# EAGLE board Bulk Board 5 (EAGLE 8.3.1)
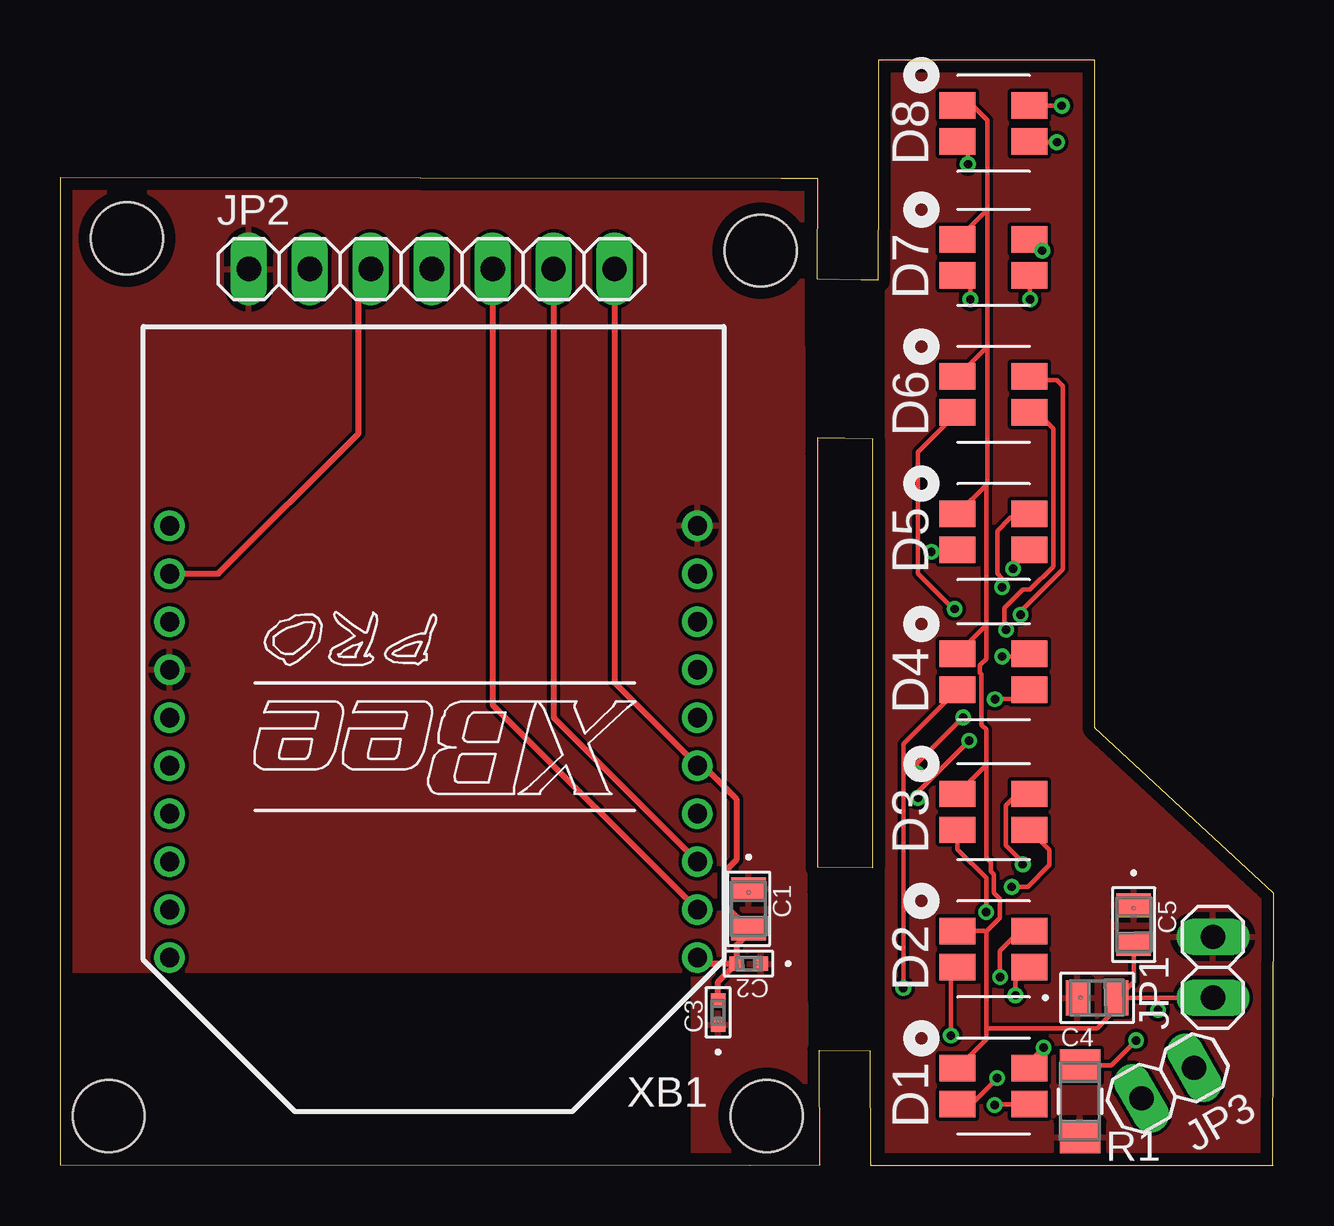
[diagram p0: board, top side]
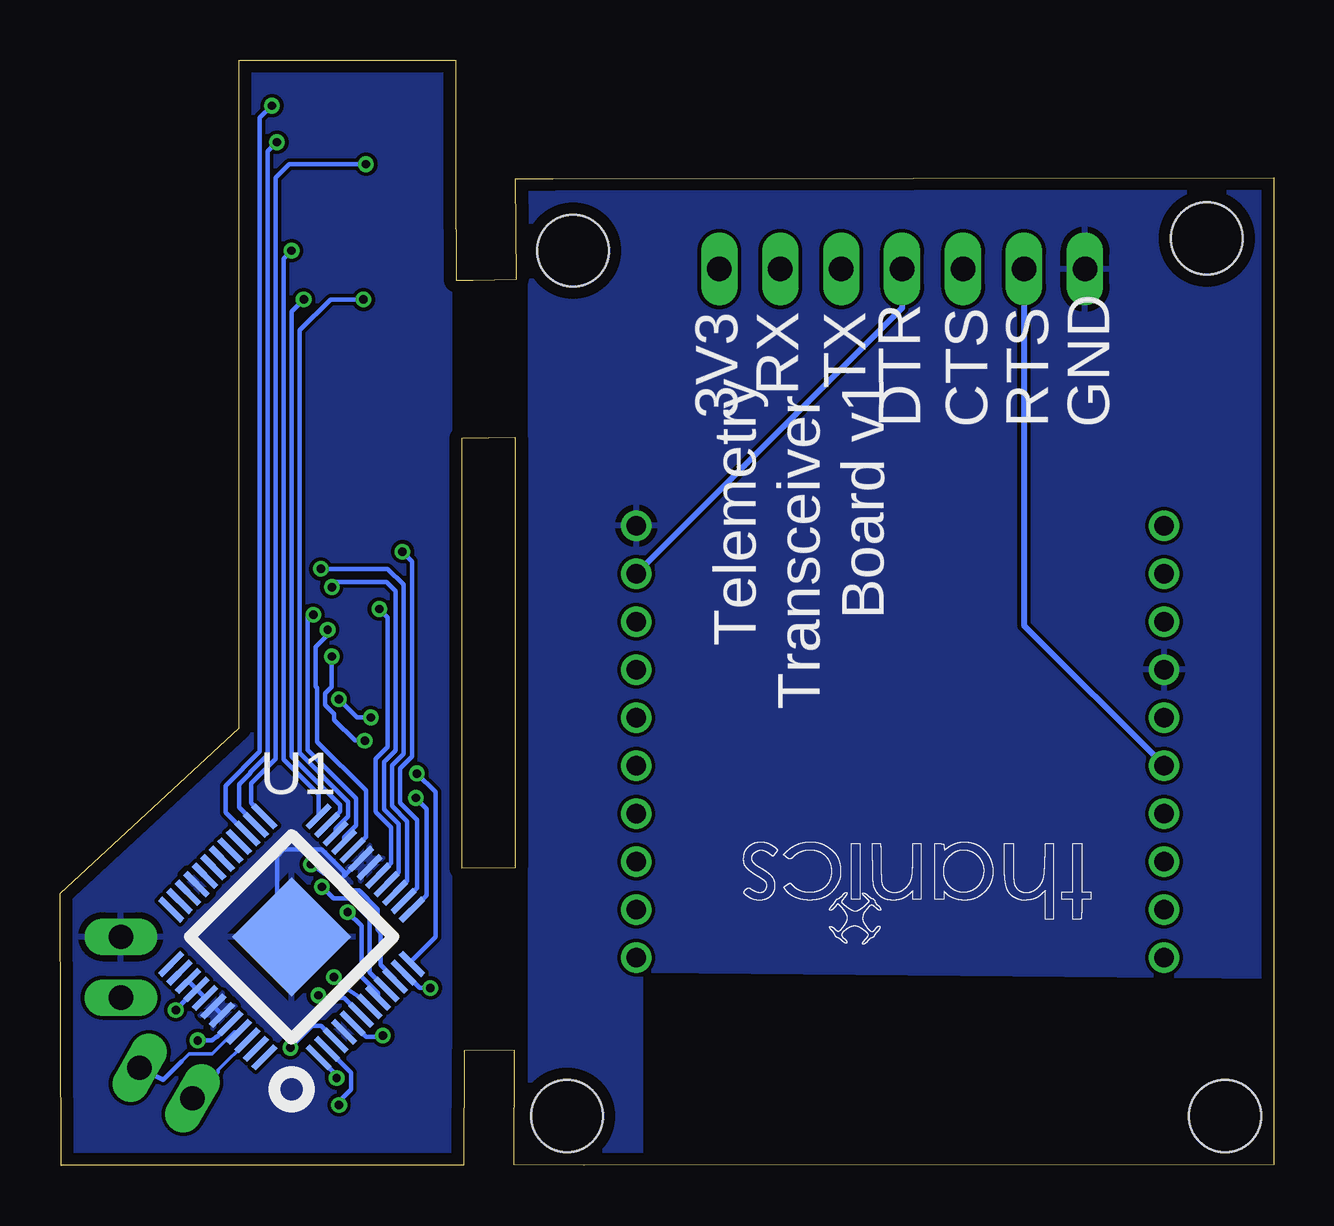
[diagram p1: board, bottom side, seen from below]

Size 50.6 x 46.1 mm. Coordinates in mm from the lower left corner, seen from the top.
Outline: 0,0.05 28.75,0.03 31.67,0.05 31.65,4.83 33.76,4.8 33.78,0.03 50.55,0.03 50.55,0 50.6,11.35 43.13,18.26 43.13,46.1 34.11,46.1 34.11,41.15 34.09,36.93 33.38,36.93 31.57,36.96 31.6,41.15 30.05,41.15 0,41.2 0,0.05
Outline: 31.6,12.45 31.6,30.35 33.86,30.33 33.86,12.42 31.6,12.45
Copper layers (1*16): Top 0.035mm / dielectric 1.6mm / Bottom 0.035mm
Design rules "Elecrow_2-layer_PCB_eagle_rule": minimum track width 6mil, minimum drill 12mil, track to track 6mil, track to pad 6mil, pad to pad 6mil, via to via 8mil, smd to smd 0mil, copper to edge 20mil, drill to drill 10mil, minimum pad ring 6mil, minimum via ring 6mil, stop-mask expansion 0mil, vias tented up to drill 100mil, thermal gap 10mil
Holes 3 mm at 2.79,38.66 29.21,38.15 29.46,2.08 2.03,2.08
tRestrict: area 0,0.1 to 26.2,7.9
bRestrict: area 0,0.1 to 26.2,7.9

## Footprints (pad centres in the part's own frame; a part is rotated, then mirrored left to right if it is on the bottom)
YAG_CC0805 = smd 0.965 x 1.448: 1 -0.826,0; 2 0.826,0
G-155-M = smd 0.559 x 0.61: 1 -0.521,0; 2 0.521,0
0805 = smd 0.965 x 1.448: 1 -0.826,0; 2 0.826,0
ASMB-MTB0_LED = smd 1.1 x 1.5: 1 -0.75,-1.5; 2 -0.75,1.5; 3 0.75,1.5; 4 0.75,-1.5
1X02 = drill 1.016 long: 1 -1.27,0; 2 1.27,0
1X07 = drill 1.016 long: 1 -7.62,0; 2 -5.08,0; 3 -2.54,0; 4 0,0; 5 2.54,0; 6 5.08,0; 7 7.62,0
RC1206N-M = smd 1.321 x 1.702: 1 -1.499,0; 2 1.499,0
TQFP-48 = smd 1.3 x 0.25: 1 -4.35,2.75; 2 -4.35,2.25; 3 -4.35,1.75; 4 -4.35,1.25; 5 -4.35,0.75; 6 -4.35,0.25; 7 -4.35,-0.25; 8 -4.35,-0.75; 9 -4.35,-1.25; 10 -4.35,-1.75; 11 -4.35,-2.25; 12 -4.35,-2.75; 25 4.35,-2.75; 26 4.35,-2.25; 27 4.35,-1.75; 28 4.35,-1.25; 29 4.35,-0.75; 30 4.35,-0.25; 31 4.35,0.25; 32 4.35,0.75; 33 4.35,1.25; 34 4.35,1.75; 35 4.35,2.25; 36 4.35,2.75 | smd 0.25 x 1.3: 13 -2.75,-4.35; 14 -2.25,-4.35; 15 -1.75,-4.35; 16 -1.25,-4.35; 17 -0.75,-4.35; 18 -0.25,-4.35; 19 0.25,-4.35; 20 0.75,-4.35; 21 1.25,-4.35; 22 1.75,-4.35; 23 2.25,-4.35; 24 2.75,-4.35; 37 2.75,4.35; 38 2.25,4.35; 39 1.75,4.35; 40 1.25,4.35; 41 0.75,4.35; 42 0.25,4.35; 43 -0.25,4.35; 44 -0.75,4.35; 45 -1.25,4.35; 46 -1.75,4.35; 47 -2.25,4.35; 48 -2.75,4.35 | smd 3.5 x 3.5: EP 0,0
XBEE-PRO = drill 0.8 pad 1.27: 1 -11,9; 2 -11,7; 3 -11,5; 4 -11,3; 5 -11,1; 6 -11,-1; 7 -11,-3; 8 -11,-5; 9 -11,-7; 10 -11,-9; 11 11,-9; 12 11,-7; 13 11,-5; 14 11,-3; 15 11,-1; 16 11,1; 17 11,3; 18 11,5; 19 11,7; 20 11,9

## Placement (x,y rotation side)
C1  1uF  [YAG_CC0805]  28.7,10.72 270 top
C2  16pF  [G-155-M]  28.7,8.43 180 top
C3  16pF  [G-155-M]  27.43,6.4 90 top
C4  0.1uF  [0805]  43.23,7.01 0 top
C5  1uF  [YAG_CC0805]  44.75,10.06 270 top
D1  [ASMB-MTB0_LED]  38.91,3.33 270 top
D2  [ASMB-MTB0_LED]  38.91,9.04 270 top
D3  [ASMB-MTB0_LED]  38.91,14.76 270 top
D4  [ASMB-MTB0_LED]  38.91,20.6 270 top
D5  [ASMB-MTB0_LED]  38.91,26.44 270 top
D6  [ASMB-MTB0_LED]  38.91,32.16 270 top
D7  [ASMB-MTB0_LED]  38.91,37.87 270 top
D8  [ASMB-MTB0_LED]  38.91,43.46 270 top
JP1  [1X02]  48.06,8.28 90 top
JP2  [1X07]  15.49,37.39 0 top
JP3  [1X02]  46.18,3.45 210 top
R1  3k3  [RC1206N-M]  42.52,2.69 90 top
U1  [TQFP-48]  40.94,9.55 135 bottom
XB1  XBEE-PRO  [XBEE-PRO]  15.57,17.69 180 top

## Library data of the parts
C1 = Telemetry Transceiver Board; COPYRIGHT: Copyright C 2015 Accelerated Designs. All rights reserved; MANUFACTURER_PART_NUMBER: CC0805KKX7R7BB105; VENDOR: Vendor
C2 C3 = Telemetry Transceiver Board; MANUFACTURER_PART_NUMBER: GRM1555C1H160JA01D; VENDOR: Murata
C4 = 0.1uF X7R Ceramic Capacitor; COPYRIGHT: Copyright C 2015 Accelerated Designs. All rights reserved; MANUFACTURER_PART_NUMBER: 08055C104KAT2A; VENDOR: Vendor
C5 = 1uF X7R Ceramic Capacitor; COPYRIGHT: Copyright C 2015 Accelerated Designs. All rights reserved; MANUFACTURER_PART_NUMBER: CC0805KKX7R7BB105; VENDOR: Vendor
D1-D8 U1 = thanics_robotics
JP1 JP3 = pinhead
JP2 = Telemetry Transceiver Board
R1 = 3.3k-resistor; MANUFACTURER_PART_NUMBER: RC1206JR073K3L; VENDOR: Yageo
XB1 = xbee; MPN: XBP24-AWI-001; OC_FARNELL: 1337916; OC_NEWARK: 42M2667

## Nets
!CTS: JP2.3 XB1.12
!DTR: JP2.4 XB1.9
!RTS: JP2.2 XB1.16
+3V3: C1.2 C2.2 C3.2 JP2.7 XB1.1 XB1.5
+5V: C4.2 C5.2 D1.1 D2.1 D3.1 D4.1 D5.1 D6.1 D7.1 D8.1 JP1.1 U1.39 U1.40 U1.41
GND: C1.1 C2.1 C3.1 JP2.1 XB1.10 XB1.14
GND1: C4.1 C5.1 JP1.2 R1.1 U1.4 U1.18 U1.19 U1.33 U1.42 U1.43 U1.EP
N$1: D1.4 U1.1
N$2: D1.3 U1.2
N$3: D2.3 U1.6
N$4: D1.2 U1.3
N$5: D2.4 U1.5
N$6: R1.2 U1.44
N$7: D3.4 U1.8
N$8: D3.3 U1.9
N$9: D3.2 U1.10
N$10: D4.4 U1.11
N$11: D4.3 U1.12
N$12: D4.2 U1.13
N$13: D5.4 U1.14
N$14: D5.3 U1.15
N$15: D5.2 U1.16
N$16: D6.4 U1.17
N$17: D6.3 U1.20
N$18: D6.2 U1.21
N$19: D7.4 U1.22
N$20: D7.3 U1.23
N$21: D7.2 U1.24
N$22: D8.4 U1.25
N$23: D8.3 U1.26
N$24: D8.2 U1.27
N$25: D2.2 U1.7
RX: JP2.6 XB1.3
SCL: JP3.2 U1.46
SDA: JP3.1 U1.45
TX: JP2.5 XB1.2

## Tracks (layer width: path | path; a pad name or v marks a point on that pad's centre or on a via)
!CTS
  Top 0.254: XB1.12 6.6,24.69 12.45,30.53 12.45,36.88 JP2.3
!DTR
  Bottom 0.254: JP2.4 15.49,35.76 XB1.9
!RTS
  Bottom 0.254: JP2.2 10.41,22.53 XB1.16
+3V3
  Top 0.254: JP2.7 23.11,20.14 XB1.5 26.8,16.69 28.19,15.29 28.19,12.75 27.69,12.24 27.69,10.91 C1.2 28.7,9.7 28.19,9.19 28.19,8.45 C2.2 | C3.2 27.43,7.68 C2.2 | C2.2 26.83,8.43 XB1.1
+5V  (via drill 0.35)
  Top 0.178: D8.1 38.04,44.21 38.66,43.59 38.66,39.87 | 38.66,39.87 D7.1 | 38.66,39.87 38.66,34.15 | 38.66,34.15 D6.1 | 38.66,34.15 38.66,28.44 38.61,28.39 | 38.61,28.39 D5.1 | 38.61,28.39 38.61,22.55 | 38.61,22.55 D4.1 | D3.1 38.61,16.71 38.61,16.59 | 38.61,9.71 38.61,9.78 39.18,10.35 39.18,11.13 38.94,11.38 38.94,12.14 38.81,12.27 38.81,12.65 38.61,12.85 38.61,16.59 | 38.61,9.71 38.61,5.74 | 38.61,5.74 38.61,5.28 D1.1 | 38.61,5.74 43.23,5.74 43.74,6.25 43.74,6.69 C4.2 | JP1.1 45.83,7.01 | C5.2 44.76,7.67 44.1,7.01 C4.2 | v45.77,6.5 45.77,6.95 45.83,7.01 | 38.61,22.55 38.61,21.14 38.35,20.88 38.35,20.55 38.4,20.5 38.4,18.39 38.61,18.19 38.61,16.59 | D2.1 38.53,9.79 38.61,9.71 | 45.83,7.01 C4.2
  Bottom 0.178: U1.39 U1.40 | U1.40 44.91,7.36 v45.77,6.5 | U1.40 U1.41
GND
  pour Top: 0,41.2 30.89,41.02 31.06,0 0,0.05
  pour Bottom: 0,41.2 30.99,41.12 30.99,-0.03 0,0.05
GND1
  Bottom 0.178: U1.42 U1.43 | U1.19 38.76,12.09 38.76,12.26 39.69,13.19 41.27,13.19 41.55,12.9 41.55,11.07 41.4,10.92 41.4,10.01 U1.EP
  pour Bottom: 34.34,46.13 50.6,46.13 50.6,-0.1 34.34,-0.1
  pour Top: 34.47,46.1 50.6,46.13 50.6,-0.1 34.47,-0.13
N$1  (via drill 0.35)
  Top 0.178: D1.4 37.98,2.58 v39.06,3.66
  Bottom 0.178: v39.06,3.66 39.06,3.78 U1.1
N$2  (via drill 0.35)
  Top 0.178: D1.3 39,2.58 v38.96,2.54
  Bottom 0.178: v38.96,2.54 38.96,2.69 38.46,3.2 38.46,3.88 U1.2
N$3  (via drill 0.35)
  Top 0.178: v39.83,7.11 39.83,7.71 D2.3
  Bottom 0.178: U1.6 38.76,7.01 39.73,7.01 v39.83,7.11
N$4  (via drill 0.35)
  Top 0.178: D1.2 40.41,4.34 v41,4.93
  Bottom 0.178: v41,4.93 40.08,5.84 39.71,5.84 U1.3
N$5  (via drill 0.35)
  Top 0.178: v37.13,5.44 37.13,8.01 D2.4
  Bottom 0.178: U1.5 37.85,5.38 37.19,5.38 v37.13,5.44
N$6  (via drill 0.35)
  Top 0.178: R1.2 43.81,4.19 v44.86,5.23
  Bottom 0.178: v44.86,5.23 44.25,5.23 44.09,5.38 44.05,5.38 U1.44
N$7  (via drill 0.35)
  Top 0.178: D3.4 37.41,13.2 38.6,12.01 v38.6,10.58
  Bottom 0.178: U1.8 37.34,7.19 38.02,7.88 38.02,10 v38.6,10.58
N$8  (via drill 0.35)
  Top 0.178: D3.3 41.25,13.17 41.25,12.55 40.34,11.63 v39.67,11.63
  Bottom 0.178: U1.9 37.69,8.08 37.69,9.3 | 37.69,9.3 | 37.69,9.3 37.69,10.57 37.79,10.57 38.37,11.15 39.19,11.15 v39.67,11.63
N$9  (via drill 0.35)
  Top 0.178: D3.2 40.3,15.39 39.78,15.39 39.42,15.04 39.42,13.41 39.42,13.36 39.56,13.22 40.03,12.75 v40.13,12.57
  Bottom 0.178: U1.10 36.63,7.78 37.24,8.38 37.24,9.73 37.36,9.85 37.36,10.7 38.14,11.48 38.72,11.48 39.44,12.2 39.61,12.2 v40.13,12.57
N$10  (via drill 0.35)
  Top 0.178: v35.15,7.42 35.15,17.59 D4.4
  Bottom 0.178: U1.11 36.26,8.07 35.61,7.42 v35.15,7.42
N$11  (via drill 0.35)
  Top 0.178: v35.72,16.36 35.72,16.77 v37.64,18.69 | v38.97,19.46 40.02,19.46 D4.3
  Bottom 0.178: U1.12 35.92,8.58 34.95,9.55 34.95,15.59 v35.72,16.36 | v37.64,18.69 38.21,18.69 v38.97,19.46
N$12  (via drill 0.35)
  Top 0.178: v39.27,21.23 40.3,21.23 D4.2 | v35.76,15.34 35.76,15.6 v37.9,17.73
  Bottom 0.178: U1.13 35.9,10.68 35.31,11.28 35.31,14.88 v35.76,15.34 | v37.9,17.73 38.3,17.73 39.17,18.59 39.17,18.85 39.54,19.22 39.54,19.69 39.27,19.96 39.27,21.08 v39.27,21.23
N$13  (via drill 0.35)
  Top 0.178: v36.32,25.6 37.33,25.6 D5.4
  Bottom 0.178: U1.14 36.26,11.04 35.71,11.58 35.71,14.43 36.42,15.14 36.42,16.56 35.92,17.07 35.92,25.2 v36.32,25.6
N$14  (via drill 0.35)
  Top 0.178: v39.73,24.89 39.73,25 D5.3
  Bottom 0.178: U1.15 36.62,11.39 36.12,11.89 36.12,14.37 36.75,15 36.75,16.7 36.28,17.17 36.28,24.24 36.93,24.89 v39.73,24.89
N$15  (via drill 0.35)
  Top 0.178: v39.27,24.13 39.27,24.49 39.06,24.69 39.06,26.47 39.62,27.03 40.25,27.03 D5.2
  Bottom 0.178: U1.16 36.98,11.74 36.47,12.24 36.47,14.25 37.08,14.86 37.08,16.83 36.61,17.31 36.61,23.96 36.98,24.33 39.06,24.33 v39.27,24.13
N$16  (via drill 0.35)
  Top 0.178: v37.29,23.22 37.24,23.22 35.76,24.69 35.76,25.36 35.75,25.37 35.75,29.75 D6.4
  Bottom 0.178: U1.17 36.8,12.62 36.8,14.12 37.41,14.73 37.41,14.76 37.44,14.78 37.44,16.97 36.94,17.47 36.94,22.86 v37.29,23.22
N$17  (via drill 0.35)
  Top 0.178: D6.3 40.73,31.41 41.4,30.73 41.4,27.84 41.4,25 40.44,24.03 40.13,24.03 39.37,23.27 39.37,22.42 v39.44,22.35
  Bottom 0.178: v39.44,22.35 39.44,22.13 39.94,21.62 39.94,19.98 39.88,19.91 39.88,17.68 37.85,15.65 37.85,13.71 U1.20
N$18  (via drill 0.35)
  Top 0.178: D6.2 40.55,32.77 41.55,32.77 41.81,32.51 41.81,24.89 40.04,23.12 v40.04,22.97
  Bottom 0.178: U1.21 38.75,13.7 38.25,14.2 38.25,15.32 40.27,17.34 40.27,22.73 | 40.27,22.73 40.27,22.97 | 40.27,22.73 v40.04,22.97
N$19  (via drill 0.35)
  Top 0.178: v37.95,36.12 37.95,36.59 D7.4
  Bottom 0.178: U1.22 39.11,14.05 38.58,14.58 38.58,15.18 40.6,17.21 40.6,34.83 39.32,36.12 v37.95,36.12
N$20  (via drill 0.35)
  Top 0.178: v40.44,36.12 40.44,37.1 D7.3
  Bottom 0.178: U1.23 39.46,14.24 38.91,14.78 38.91,15.05 40.94,17.07 40.94,35.62 v40.44,36.12
N$21  (via drill 0.35)
  Top 0.178: v40.95,38.15 40.88,38.15 D7.2
  Bottom 0.178: U1.24 39.81,15.48 41.27,16.94 41.27,37.82 v40.95,38.15
N$22  (via drill 0.35)
  Top 0.178: v37.85,41.76 37.85,42.28 D8.4
  Bottom 0.178: U1.25 42.08,14.59 42.62,15.14 42.62,15.94 41.6,16.96 41.6,41.2 41.05,41.76 v37.85,41.76
N$23  (via drill 0.35)
  Top 0.178: v41.55,42.67 40.45,42.67 D8.3
  Bottom 0.178: U1.26 42.43,14.24 43.13,14.93 43.13,15.9 42.67,16.36 42.67,16.4 41.94,17.13 41.94,42.29 v41.55,42.67
N$24  (via drill 0.35)
  Top 0.178: v41.76,44.2 40.43,44.2 D8.2
  Bottom 0.178: U1.27 42.82,13.86 43.69,14.73 43.69,15.85 42.27,17.27 42.27,43.69 v41.76,44.2
N$25  (via drill 0.35)
  Top 0.178: v39.18,7.87 39.18,8.96 39.83,9.6 40.22,9.6 D2.2
  Bottom 0.178: U1.7 37.78,6.8 38.57,7.34 38.65,7.34 v39.18,7.87
RX
  Top 0.254: JP2.6 20.57,18.68 XB1.3
SCL
  Bottom 0.152: U1.46 42.78,5.22 43.99,4.01 43.99,3.9 JP3.2
SDA
  Bottom 0.152: U1.45 43.34,5.59 44.26,4.68 45.21,4.68 45.52,4.37
  Bottom 0.178: JP3.1 46.3,3.58 45.52,4.37
TX
  Top 0.254: JP2.5 18.03,19.22 XB1.2

## Text on the board
tPlace: R1
bPlace: TX | RX | 3V3 | Telemetry / Transceiver / Board v1 | GND | RTS | CTS | DTR | U1